# EAGLE board topeni_Arduino_Mega_Pro_Mini (EAGLE 8.0.2)
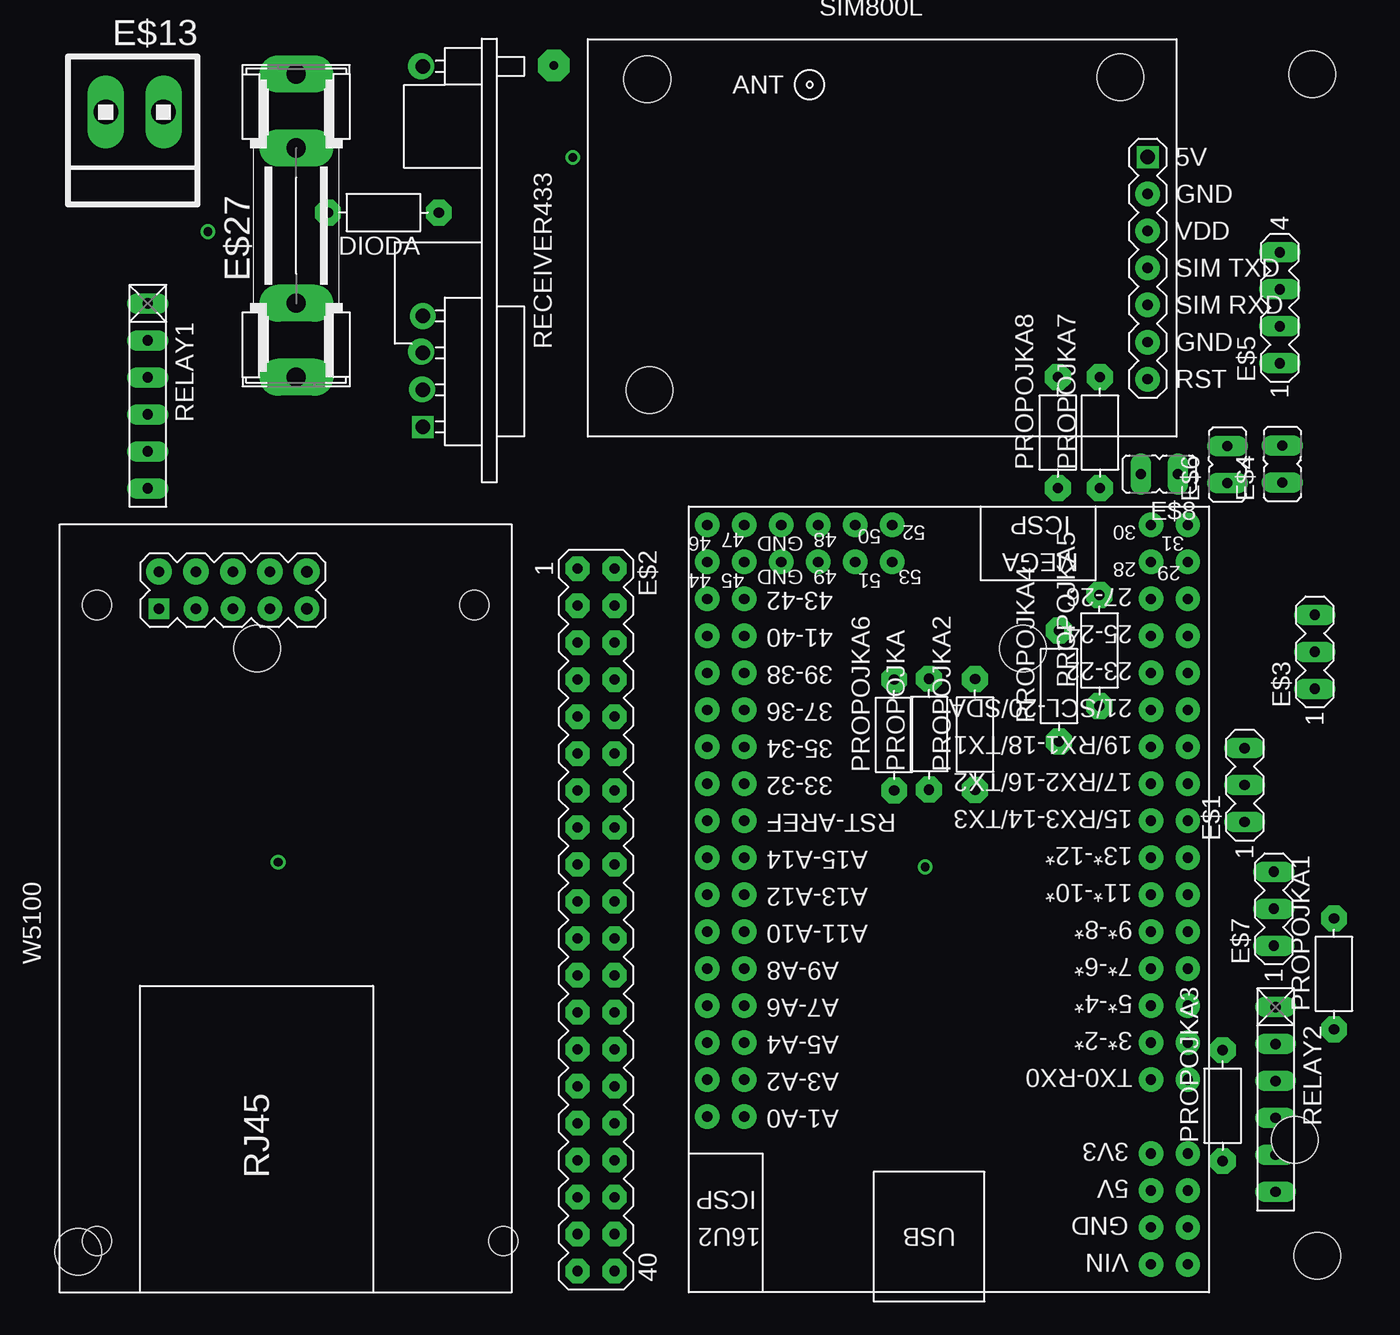
[diagram p0: board, top side]
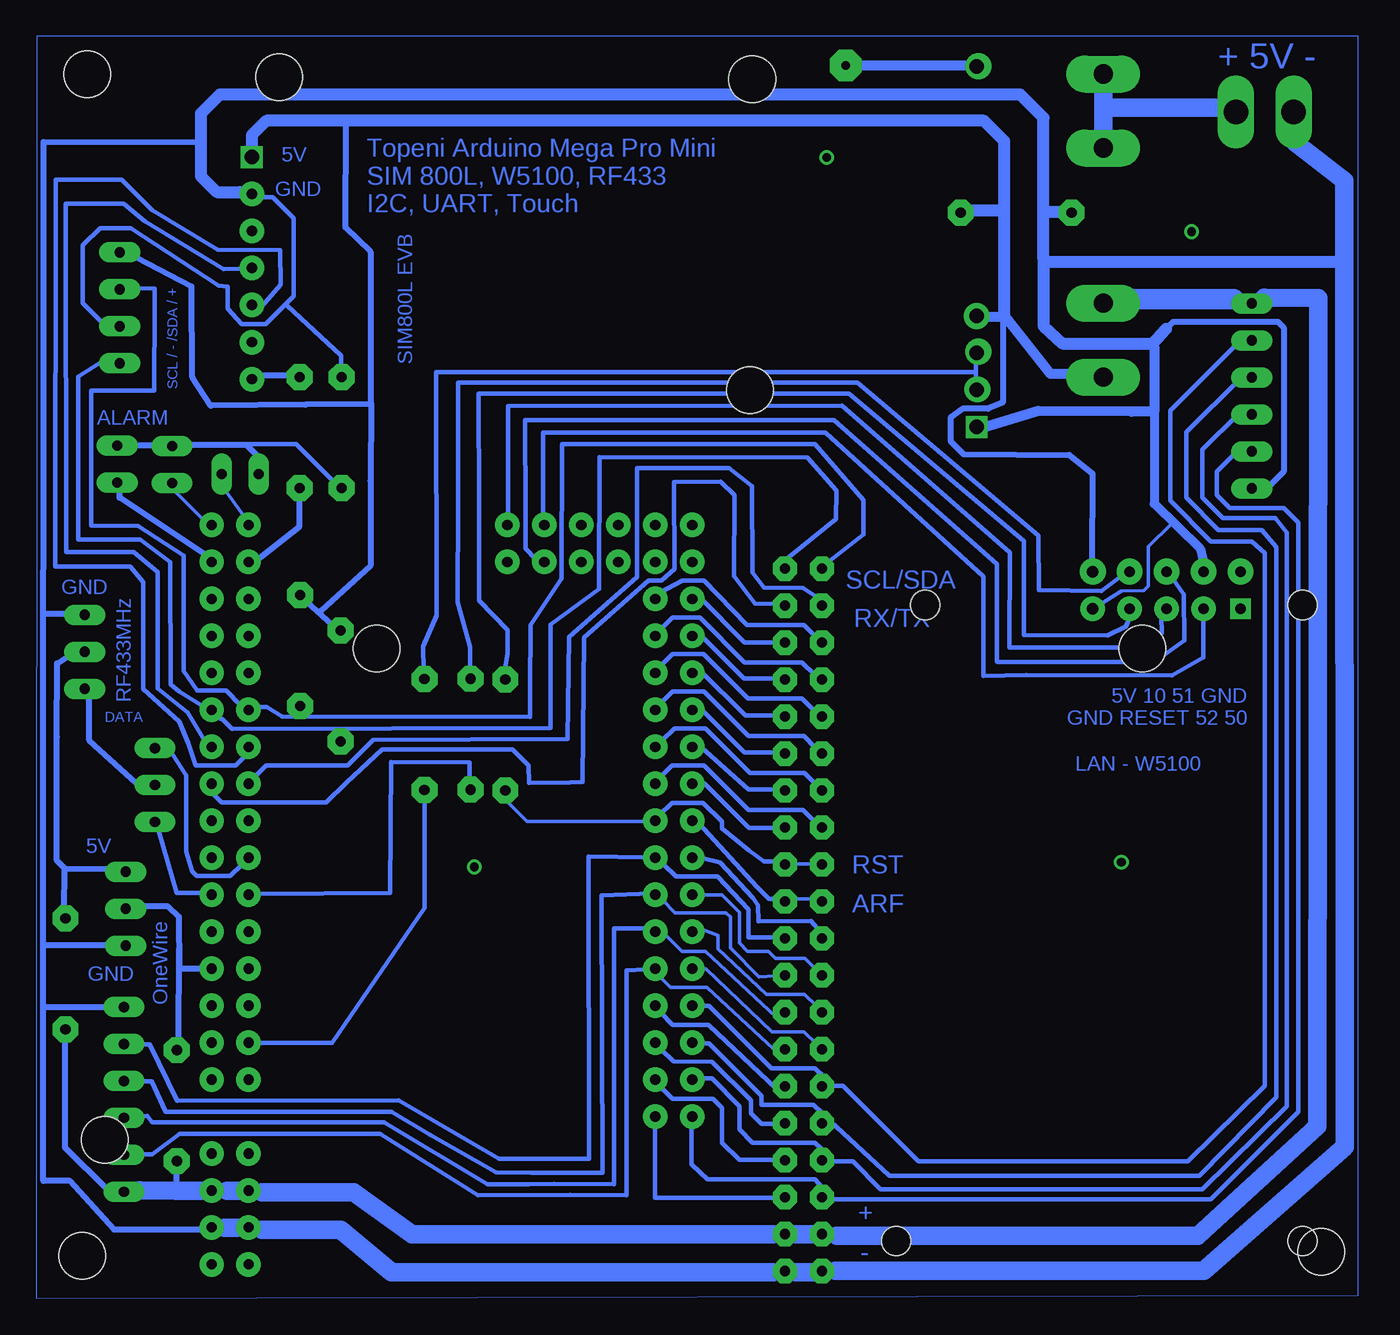
[diagram p1: board, bottom side, seen from below]

No outline drawn. Coordinates in mm, seen from the top.
Copper layers (1*16): Top 0.035mm / dielectric 1.5mm / Bottom 0.035mm
Design rules "default": minimum track width 10mil, minimum drill 24mil, track to track 8mil, track to pad 8mil, pad to pad 8mil, via to via 8mil, smd to smd 8mil, copper to edge 40mil, drill to drill 8mil, minimum pad ring 10mil, minimum via ring 8mil, stop-mask expansion 4mil, vias tented up to drill 0mil, thermal gap 10mil
Holes 3.2 mm at 87.3,83.9 86.1,10.7 2.53,3.01 87.64,2.72 14.82,44.43 67.44,44.43

## Footprints (pad centres in the part's own frame; a part is rotated, then mirrored left to right if it is on the bottom)
R-7,5 = drill 0.7 pad 1.778 octagon: 1 -3.81,0; 2 3.81,0
MA03-1 = drill 0.7 pad 1.422 long: 1 -2.54,0; 2 0,0; 3 2.54,0
MA20-2 = drill 0.7 pad 1.676 octagon: 1 -24.13,-1.27; 2 -24.13,1.27; 3 -21.59,-1.27; 4 -21.59,1.27; 5 -19.05,-1.27; 6 -19.05,1.27; 7 -16.51,-1.27; 8 -16.51,1.27; 9 -13.97,-1.27; 10 -13.97,1.27; 11 -11.43,-1.27; 12 -11.43,1.27; 13 -8.89,-1.27; 14 -8.89,1.27; 15 -6.35,-1.27; 16 -6.35,1.27; 17 -3.81,-1.27; 18 -3.81,1.27; 19 -1.27,-1.27; 20 -1.27,1.27; 21 1.27,-1.27; 22 1.27,1.27; 23 3.81,-1.27; 24 3.81,1.27; 25 6.35,-1.27; 26 6.35,1.27; 27 8.89,-1.27; 28 8.89,1.27; 29 11.43,-1.27; 30 11.43,1.27; 31 13.97,-1.27; 32 13.97,1.27; 33 16.51,-1.27; 34 16.51,1.27; 35 19.05,-1.27; 36 19.05,1.27; 37 21.59,-1.27; 38 21.59,1.27; 39 24.13,-1.27; 40 24.13,1.27
JP1Y = drill 0.7 pad 1.422 long: 1 0,-1.27; 2 0,1.27
MA04-1 = drill 0.7 pad 1.422 long: 1 -3.81,0; 2 -1.27,0; 3 1.27,0; 4 3.81,0
MEGA2560_PRO_MINI = drill 0.7 pad 1.676: 2 -33.02,36.83; 3 -35.56,36.83; 3V31 -35.56,44.45; 3V32 -33.02,44.45; 4 -33.02,34.29; 5 -35.56,34.29; 5V1 -35.56,46.99; 5V2 -33.02,46.99; 6 -33.02,31.75; 7 -35.56,31.75; 8 -33.02,29.21; 9 -35.56,29.21; 10 -33.02,26.67; 11 -35.56,26.67; 12 -33.02,24.13; 13 -35.56,24.13; 14 -33.02,21.59; 15 -35.56,21.59; 16 -33.02,19.05; 17 -35.56,19.05; 18 -33.02,16.51; 19 -35.56,16.51; 22 -33.02,11.43; 23 -35.56,11.43; 24 -33.02,8.89; 25 -35.56,8.89; 26 -33.02,6.35; 27 -35.56,6.35; 28 -33.02,3.81; 29 -35.56,3.81; 30 -33.02,1.27; 31 -35.56,1.27; 32 -2.54,19.05; 33 -5.08,19.05; 34 -2.54,16.51; 35 -5.08,16.51; 36 -2.54,13.97; 37 -5.08,13.97; 38 -2.54,11.43; 39 -5.08,11.43; 40 -2.54,8.89; 41 -5.08,8.89; 42 -2.54,6.35; 43 -5.08,6.35; 44 -2.54,3.81; 45 -5.08,3.81; 46 -2.54,1.27; 47 -5.08,1.27; 48 -10.16,1.27; 49 -10.16,3.81; 50 -12.7,1.27; 51 -12.7,3.81; 52 -15.24,1.27; 53 -15.24,3.81; A0 -2.54,41.91; A1 -5.08,41.91; A2 -2.54,39.37; A3 -5.08,39.37; A4 -2.54,36.83; A5 -5.08,36.83; A6 -2.54,34.29; A7 -5.08,34.29; A8 -2.54,31.75; A9 -5.08,31.75; A10 -2.54,29.21; A11 -5.08,29.21; A12 -2.54,26.67; A13 -5.08,26.67; A14 -2.54,24.13; A15 -5.08,24.13; AREF -2.54,21.59; GND1 -35.56,49.53; GND2 -33.02,49.53; GND3 -7.62,3.81; GND4 -7.62,1.27; RST -5.08,21.59; RX0 -35.56,39.37; SCL -35.56,13.97; SDA -33.02,13.97; TX0 -33.02,39.37; VIN1 -35.56,52.07; VIN2 -33.02,52.07
1X2MTA = drill 1.676 long: 1 1.981,0; 2 -1.981,0
SHK20L = drill 1.321 pad 2.54 long: 1A -10.414,0; 1B -5.334,0; 2A 10.414,0; 2B 5.334,0
WIRELESS-XY-MK-5V#V = drill 1 square: 1 11.43,0 | drill 1: 2 8.89,0; 3 6.35,0; 4 3.81,0; ANT -13.335,0
RN-6 = drill 0.7 pad 1.422 long: 1 -6.35,0; 2 -3.81,0; 3 -1.27,0; 4 1.27,0; 5 3.81,0; 6 6.35,0
GPS-RECEIVER-NEO6M = drill 1 square: 1 18.295,5.71 | drill 0.7 pad 1.676: 2 18.295,3.17; 3 18.295,0.63; 4 18.295,-1.91; 5 18.295,-4.45; 6 18.295,-7.01; 7 18.295,-9.55 | hole 3.2: -15.925,-10.29; -16.079,11.06; 16.435,11.19
ETHERNET-ENC28J60 = drill 0.7 pad 1.422 square: 1 21.59,9.7 | drill 0.7 pad 1.778: 2 24.13,9.7; 4 24.13,7.16; 6 24.13,4.62; 8 24.13,2.08 | drill 0.7 pad 1.676: 3 21.59,7.16; 5 21.59,4.62; 7 21.59,2.08; 11 24.13,-0.46; 12 21.59,-0.46 | drill 0.8 pad 1.676: 9 21.59,-0.46 | drill 0.8 pad 1.778: 10 24.13,-0.46 | hole 2: -21.844,13.97; 21.844,13.97; -21.844,-13.97; 21.844,-11.97

## Placement (x,y rotation side)
DIODA  D1  [R-7,5]  23.49,74.39 180 top
E$1  DATA SEL  [MA03-1]  82.66,35.06 90 top
E$2  [MA20-2]  38.1,25.8 270 top
E$3  RF433  [MA03-1]  87.48,44.22 90 top
E$4  [JP1Y]  85.25,57.12 0 top
E$5  [MA04-1]  85.07,67.85 90 top
E$6  [JP1Y]  81.48,57.09 0 top
E$7  DATA SEL  [MA03-1]  84.67,26.57 90 top
E$8  [JP1Y]  76.8,56.43 90 top
E$11  [MEGA2560_PRO_MINI]  43.2,54.2 180 top
E$13  [1X2MTA]  6.4,81.3 180 top
E$27  [SHK20L]  17.5,73.5 90 top
PROPOJKA  0  [R-7,5]  60.98,38.56 90 top
PROPOJKA1  0  [R-7,5]  88.8,22.09 90 top
PROPOJKA2  0  [R-7,5]  64.14,38.53 90 top
PROPOJKA3  0  [R-7,5]  81.15,13.04 90 top
PROPOJKA4  0  [R-7,5]  69.9,41.87 90 top
PROPOJKA5  0  [R-7,5]  72.68,44.31 90 top
PROPOJKA6  0  [R-7,5]  58.58,38.51 90 top
PROPOJKA7  0  [R-7,5]  72.72,59.28 90 top
PROPOJKA8  0  [R-7,5]  69.82,59.28 90 top
RECEIVER433  [WIRELESS-XY-MK-5V#V]  26.2,71.1 270 top
RELAY1  [RN-6]  7.3,61.8 270 top
RELAY2  [RN-6]  84.79,13.46 270 top
SIM800L  [GPS-RECEIVER-NEO6M]  57.7,72.5 0 top
W5100  [ETHERNET-ENC28J60]  17.77,25.59 90 top

## Library data of the parts
DIODA PROPOJKA PROPOJKA1-PROPOJKA8 = discrete
E$1-E$3 E$5 E$7 = con-lstb
E$4 E$6 E$8 = jumper
E$11 = My Library
E$13 = con-amp
E$27 = fuse
RECEIVER433 SIM800L W5100 = diy-modules
RELAY1 RELAY2 = resistor-net

## Tracks (layer width: path | path; a pad name or v marks a point on that pad's centre or on a via)
S$1
  Bottom 0: 0,0 0,86.5 90.76,86.5 90.8,-0.2 0,0
S$2
  Bottom 1.27: 4.3,79.2 0.94,76.6 0.92,10.2 10.6,1.7 35.9,1.7
S$3
  Bottom 1.27: 17.5,83 17.5,79.8
S$4
  Bottom 0.7: 19.8,63.3 21.11,63.3 24.2,67.2 25.7,67.2
S$5
  Bottom 1.27: 9.4,81.6 17.2,81.6
S$6
  Bottom 1.422: 15.52,68.44 8.54,68.44
S$7
  Bottom 1.27: 6.43,68.54 2.74,68.52 2.8,11.6 11,4.1 35.8,4.1
S$8
  Bottom 0.406: 13.2,66.4 12.7,66.9 5.5,66.9 5.1,66.5 5.1,56.6 6.3,55.4 6.4,55.4
  Bottom 0.813: 1.2,71 21.6,71 21.6,66.6 20.3,65.4 14.1,65.4 13.2,66.4
S$9
  Bottom 0.7: 14,65.2 14,60.71 15.57,60.71 21.97,60.76 25.7,59.62
S$10  (via drill 0.6 pad 2.18)
  other vias: 35.2,84.5
S$11
  Bottom 0.7: 26.8,84.5 34.4,84.5
S$12
  Bottom 0.813: 21.6,71.2 21.6,80.9 23.2,82.5 78.2,82.5 79.5,81.2 79.5,76.9 78.4,75.8 76.8,75.8
S$13
  Bottom 0.813: 24.3,67.4 24.3,79.3 25.7,80.7 75,80.7 76,79.7 76,78.6
S$14
  Bottom 0.305: 48.93,22.39 50.26,22.32 50.25,6.88 54.15,6.9 60.44,6.87 67.2,11.1 80.94,11.1 82.83,9.68 83.87,9.68
S$15
  Bottom 0.305: 45.8,11.5 45.8,9 44.7,7.98 37.3,7.98 36.8,7.4
S$16
  Bottom 0.305: 47.9,14.3 47.1,13.5 44.3,13.5 43.7,12.9 43.7,10.5 42.5,9.3 40.1,9.3
S$17
  Bottom 0.305: 45.1,14.9 44.4,14.9 42.5,13 42.5,11.4 41.6,10.5 37.3,10.5 36.9,10.1
S$18
  Bottom 0.305: 47.9,16.9 47.04,16.09 44.4,16.06 41.7,13.4 41.7,12.5 41,11.8 39.9,11.8
S$19
  Bottom 1.27: 76.9,7.2 77.7,7.2
S$20
  Bottom 1.27: 79.4,7.2 81.2,7.2 83.71,7.21
S$21
  Bottom 1.27: 76.99,4.64 77.88,4.64
S$22
  Bottom 0.406: 79.5,4.5 85.47,4.52 88.5,7.86 90.32,7.86 90.34,19.82 86.21,19.82
S$23
  Bottom 0.305: 49,25.23 51.11,25.22 51.12,7.64 55.23,7.66 56.95,7.62 59.79,7.64 66.9,11.9 82.86,11.9 83.19,12.34 84.24,12.3
S$24
  Bottom 0.305: 45.1,17.3 44.6,17.3 41,13.7 41,13.1 37.4,13.1 36.8,12.5
S$25
  Bottom 0.305: 47.9,19.4 47.1,18.6 44.62,18.58 39.92,14.16 39.9,14.4
S$26
  Bottom 0.305: 45.1,19.9 44.6,19.9 40.3,15.6 37.3,15.6 36.7,15
S$27
  Bottom 0.305: 48.49,27.62 51.96,27.47 51.91,8.44 56.83,8.44 59.21,8.47 63.75,11.04 66.4,12.6 81.92,12.6 82.88,14.72 84.16,14.72
S$28
  Bottom 0.305: 48.84,30.09 52.85,30.16 52.83,9.39 57.71,9.37 58.89,9.39 59,9.38 65.9,13.4 81.11,13.36 83.03,17.26 84.22,17.26
S$29
  Bottom 0.305: 36.1,6.6 10.1,6.6 4.1,12.6 4.1,53.1 5.1,54.1 8.8,54.1 9.7,55 9.7,56.6 8.3,58
S$30
  Bottom 0.305: 36.2,9.2 34.7,9.2 32.8,7.3 10.7,7.3 4.9,13 4.9,52.4 5.7,53.4 9.3,53.4 10.7,54.8 10.7,58.1 8.2,60.6
S$31
  Bottom 0.305: 36.28,11.98 32.2,8.2 10.9,8.2 5.6,13.6 5.6,51.4 6.6,52.6 9.6,52.6 11.8,54.8 11.8,59.3 8.1,63
  Bottom 0.406: 36.29,11.98 36.28,11.98
S$32
  Bottom 0.305: 36.2,14.4 35.4,14.4 30.2,9.2 11.7,9.2 6.4,14.4 6.4,51 7.3,51.8 10.1,51.8 12.9,54.6 12.9,60.8 8.2,65.5
S$33
  Bottom 1.27: 75.3,7.1 69,7.1 65,4.2 40.2,4.2
S$34
  Bottom 1.27: 75.28,4.5 69.9,4.5 66.4,1.59 40.2,1.6
S$35
  Bottom 1.27: 37.5,4.2 38.6,4.2
S$36
  Bottom 1.27: 37.4,1.6 38.6,1.6
S$37
  Bottom 0.61: 14,61.8 14,54.4 10.84,51.31 10.65,50.55
S$38
  Bottom 0.406: 24.4,67 24.4,61.35 25.42,60.92 27.16,60.92 28,60.3 28,58.7 27.1,57.8 19.84,57.75 18.25,56.45 18.28,50.36
S$39
  Bottom 0.305: 10.64,46.63 10.64,43.83 12.79,42.59 22.8,42.64 25.74,42.57 25.74,49.38 36.58,59.28 55.98,59.28 55.98,53.42
S$40
  Bottom 0.305: 12.77,49.27 11.96,48.15 11.95,44.99 14,43.51 24.77,43.51 24.81,43.55 24.8,50.24 36,60.13 57.21,60.14 57.2,53.9 57.2,51.3 56.5,50.6
S$41
  Bottom 0.305: 13.5,46.61 13.49,45.52 14.68,44.5 23.95,44.52 23.93,51.03 35.46,61.12 58.41,61.11 58.4,53.53
S$42
  Bottom 0.305: 16.39,49.32 17.65,48.41 21.94,48.45 21.95,52.22 34.39,62.7 61.84,62.72 61.84,54.51 61.85,47.65 61.01,44.55 61.01,43.06
S$43
  Bottom 0.305: 15.72,46.52 15.94,45.95 17.23,45.35 22.96,45.37 22.95,47.53 22.95,51.84 34.98,61.97 60.41,61.97 60.4,54.4 60.4,49.2 60.39,48.57 60.39,47.74 58.42,45.73 58.43,44.89 58.44,44.11 58.65,42.88
S$44
  Bottom 0.305: 26.25,64.05 26.25,62.87
S$45
  Bottom 0.305: 26.28,63.43 63.35,63.43 63.31,46.71 64.24,44.59 64.21,42.96
S$46
  Bottom 0.305: 61.04,35.41 61.04,36.63 66.43,36.65 66.49,27.64 75.6,27.6
S$47
  Bottom 0.305: 64.14,33.98 64.14,26.63 70.49,17.34 75.63,17.34 75.66,17.37
S$48
  Bottom 0.305: 76.73,70.54 77.92,70.52 83.37,73.8 84.81,75.02 88.78,75.02 88.74,51.06 84.11,51.06 82.47,49.7 82.47,41.71 80.41,40.04 79.08,37.81
S$49
  Bottom 0.305: 75.32,67.95 74.03,69.45 74.05,71.83 78.34,71.85 82.84,74.57 84.94,76.67 89.46,76.67 89.49,50.08 87.7,50.06 84.36,50.06 83.47,49.01 83.47,41.69 83.46,41.68 80.98,39.44 80.38,37.95 79.86,36.41 77.11,36.41 76.45,37.07
S$50
  Bottom 0.305: 40.15,47.5 41.43,47.53 42.86,49.41 42.85,55 43.79,55.91 46.98,55.88 46.96,49.9 47.85,49.1 48.75,49.1 53.17,45.2 53.29,35.27 54.14,35.23 56.94,35.2 56.97,36.41 58.08,37.52 67.06,37.52 69.49,35.23 70.91,33.87 78.07,33.87 78.6,34.4
S$51
  Bottom 0.305: 36.97,47.84 38.13,48.61 40.8,48.62 41.61,49.66 41.64,55.62 43.22,56.85 49.54,56.83 49.53,49.36 54.21,45.24 54.31,38.24 67.68,38.15 69.42,36.41 75,36.41 75.86,35.55
S$52
  Bottom 0.305: 39.82,50.14 35.87,53.35 35.84,55.3 37.83,57.57 52.12,57.59 52.13,48.53 55.49,46.11 55.48,38.99 77.34,38.91 78.01,39.58 78.6,39.81
S$53
  Bottom 0.305: 36.3,50.47 33.97,52.29 33.98,54.65 37.3,58.48 43.02,58.49 54.69,58.48 54.71,49.24 56.84,46.07 56.88,41.64 56.9,39.75 73.93,39.76 74.99,40.41 75.66,40.42
S$54
  Bottom 0.305: 79.45,27.64 81.16,27.67 82.41,31.92
S$55
  Bottom 0.305: 76.67,29.62 77.47,28.82 79.79,28.82 80.09,29.12 80.52,30.51 80.5,35.72 81.76,37.66
S$56
  Bottom 0.406: 83.55,34.87 87.17,38.13 87.18,41.19
S$57
  Bottom 0.406: 90.34,19.71 90.34,20.45 90.3,79.25 79.84,79.24
S$58
  Bottom 0.406: 88.8,46.83 90.09,46.83
S$59
  Bottom 0.406: 85.95,7.3 88.83,10.15 88.83,17.49
S$60
  Bottom 0.406: 86.04,29.3 88.88,29.26 88.92,26.52
S$61
  Bottom 0.406: 79.43,22.43 80.95,22.45 80.99,26.02 81.75,26.71 83.64,26.71
S$62
  Bottom 0.406: 85.88,24.02 85.92,24.06 90.14,24.06
S$63
  Bottom 0.406: 81.18,17.43 81.03,17.58 80.99,23.79
S$64
  Bottom 0.406: 81.21,8.52 81.21,7.12
S$65
  Bottom 0.406: 88.84,29.33 89.39,29.88 89.39,38.4 89.37,43.42 88.34,44.1
S$66
  Bottom 0.305: 79.44,40.54 80.98,41.49 81.59,41.97 81.6,50.37 83.68,51.93 87.94,51.93 87.94,63.12 86.23,64.18
S$67
  Bottom 0.305: 76.79,40.58 77.77,41.56 79.74,41.56 80.68,42.91 80.68,50.83 83.8,52.85 87.05,52.89 87.05,62.17 82.71,62.16 82.68,68.12 82.67,69.18 84.31,69.2
S$68
  Bottom 0.305: 75.45,75.45 74.58,75.45 73.13,74 73.13,68.64 75.04,66.73 76.71,66.73 77.67,67.79 77.67,69.31 78.26,69.37 84.32,73.32 86.42,73.32 87.6,72.14 87.6,68.16 86.27,66.83
S$69
  Bottom 0.406: 69.57,80.63 69.58,73.38 67.84,71.71 67.84,61.24 72.33,61.19 78.82,61.12 80.08,63.1 80.14,69.32 83.87,71.27
S$70
  Bottom 0.406: 70.43,46.03 72.25,47.68
S$71
  Bottom 0.406: 67.82,61.31 67.85,55.96 67.84,50.14 71.27,47.03
S$72
  Bottom 0.305: 47.75,29.66 46.86,28.77 44,28.77 41.86,26.52 41.89,24.6 40.06,24.58
S$73
  Bottom 0.305: 45.12,30.07 43.85,29.74 41.57,27.31 41.21,26.81 41.18,25.69 37.6,25.73 36.92,24.97
S$74
  Bottom 0.305: 47.98,33 47.14,33.84 45,33.84 43.71,32.55 43.71,32.07 41.83,30.56 40.8,29.81 39.94,29.81
S$75
  Bottom 0.305: 45.08,32.23 45.32,32.47 41.29,28.05 40.48,27.24 40.05,27.24
S$76
  Bottom 0.305: 45.04,35.17 44.91,35.17 41.85,32.11 40.17,32.11
S$77
  Bottom 0.305: 47.9,35.65 47.13,36.42 44.92,36.42 41.86,33.36 38.12,33.36 37.27,32.51 37.23,32.51
S$78
  Bottom 0.305: 45.09,37.63 41.87,34.77 39.89,34.77
S$79
  Bottom 0.305: 47.81,38.11 46.97,38.95 44.84,38.95 41.78,35.89 38.03,35.89 37.35,35.21 37.23,35.21
S$80
  Bottom 0.305: 45.16,40.32 42.14,37.3 39.64,37.3
S$81
  Bottom 0.305: 47.94,40.64 47.09,41.49 44.92,41.49 41.86,38.43 38.07,38.43 37.3,37.66 37.15,37.66
S$82
  Bottom 0.305: 45.2,42.94 42.1,39.84 39.73,39.84
S$83
  Bottom 0.305: 47.94,43.22 47.1,44.06 44.96,44.06 41.9,41 38.2,41 37.28,40.08 37.15,40.08
S$84
  Bottom 0.305: 45.24,45.43 42.18,42.37 39.73,42.37
S$85
  Bottom 0.305: 47.98,45.67 47.09,46.56 45.2,46.56 42.14,43.5 38.2,43.5 37.31,42.61 37.11,42.61
S$86
  Bottom 0.305: 45.24,47.97 42.14,44.87 39.81,44.87
S$87
  Bottom 0.305: 47.94,48.29 46.41,49.12 44.93,49.12 41.98,46.07 38.07,46.07 37.23,45.23 37.15,45.23
S$88
  Bottom 0.254: 58.57,34.03 57.1,32.56 48.85,32.56
S$89
  Bottom 0.254: 37.59,29.62 37.62,29.65 38.78,29.65
S$90
  Bottom 0.254: 37.48,27.23 38.89,27.23
S$91
  Bottom 0.406: 79.26,50.95 85.09,54.8 85.09,55.25
S$92  (via drill 0.5 pad 1.78)
  other vias: 26.2,67.28
S$93  (via drill 0.5 pad 1.78)
  other vias: 26.08,64.83
S$94  (via drill 0.5 pad 1.78)
  other vias: 26.16,62.25
S$95  (via drill 0.5 pad 1.78)
  other vias: 26.08,84.46
S$96
  Bottom 0.305: 48.3,11.5 48.3,6.7 40,6.7
S$97
  Bottom 0.254: 45.12,27.52 43.71,27.52 42.51,26.32 42.51,24.22 41.93,23.64 40.51,23.64 40.01,23.14 37.98,23.14 37.33,22.49
S$98
  Bottom 0.254: 47.8,27.16 46.93,26.29 43.41,26.29 43.12,26 43.13,23.86 41.17,21.9 40.01,21.94
S$99
  Bottom 0.254: 45.15,25.13 44.8,25.03 43.97,24.73 43.96,23.8 40.64,20.68 38.02,20.68 37.22,19.88
S$100
  Bottom 0.254: 47.98,24.66 47.48,24.66 46.46,23.64 44.83,23.64 39.98,19.12 39.93,19.78 39.5,19.99
S$101
  Bottom 0.254: 45.19,22.45 44.78,22.45 40.25,18.1 38.05,18.1 37.22,17.27
S$102
  Bottom 0.254: 48.05,21.98 47.22,21.15 44.72,21.15 40.14,16.91 40.05,16.91
S$103
  Bottom 0.305: 37.19,50.34 37.11,50.34
S$104
  Bottom 0.406: 82.22,58.38 84.27,58.38 84.1,58.4
S$105
  Bottom 0.254: 17.56,47.56 16.26,48.4 14.71,48.42 14.39,48.74 14.39,51.44 12.83,53 12.83,53.08
S$106
  Bottom 0.813: 20.35,74.43 21.55,74.43
S$107
  Bottom 0.813: 24.63,74.54 26.56,74.54
S$108
  Bottom 0.406: 73.32,63.2 75.51,63.18 75.92,63.59
S$109
  Bottom 0.406: 72.76,54.76 72.76,52.78 75.8,50.39
S$110
  Bottom 0.254: 79.16,53.34 79.37,53.34 81.32,55.29
S$111
  Bottom 0.254: 76.59,53.37 76.59,53.62 77.86,55.35
S$112
  Bottom 0.406: 75.65,57.73 76.34,58.42 80.36,58.42
S$113
  Bottom 0.305: 73.58,68.01 69.85,64.58 69.85,63.63
S$114
  Bottom 0.305: 70.42,55.96 72.95,58.49 77.94,58.49
S$115  (via drill 0.6)
  other vias: 87.35,83.91
S$116  (via drill 0.6)
  other vias: 87.68,2.82
S$117  (via drill 0.6)
  other vias: 2.41,2.98
S$118  (via drill 0.6)
  other vias: 16.26,29.77
S$119  (via drill 0.6)
  other vias: 60.72,29.44
S$120  (via drill 0.6)
  other vias: 36.5,78.19
S$121  (via drill 0.6)
  other vias: 11.44,73.08

## Text on the board
Bottom: + 5V - | 5V | GND | Topeni Arduino Mega Pro Mini / SIM 800L, W5100, RF433 / I2C, UART, Touch | SIM800L EVB | SCL / - /SDA / + | ALARM | SCL/SDA | GND | RF433MHz | RX/TX | 5V 10 51 GND / GND RESET 52 50 | DATA | LAN - W5100 | 5V | RST | ARF | OneWire | GND | + | -